# Altium PCB TMC5160_BOB_V1_2.PcbDoc
Units mm, origin at the board's own origin, x right, y up, seen from the top; angles counter-clockwise.
Board outline 38.1 x 27.94 mm, 4 copper layers (Top, GND, VM, Bottom), stack 0.704 mm thick; 48 components, 53 nets, 175 pads, 144 vias.
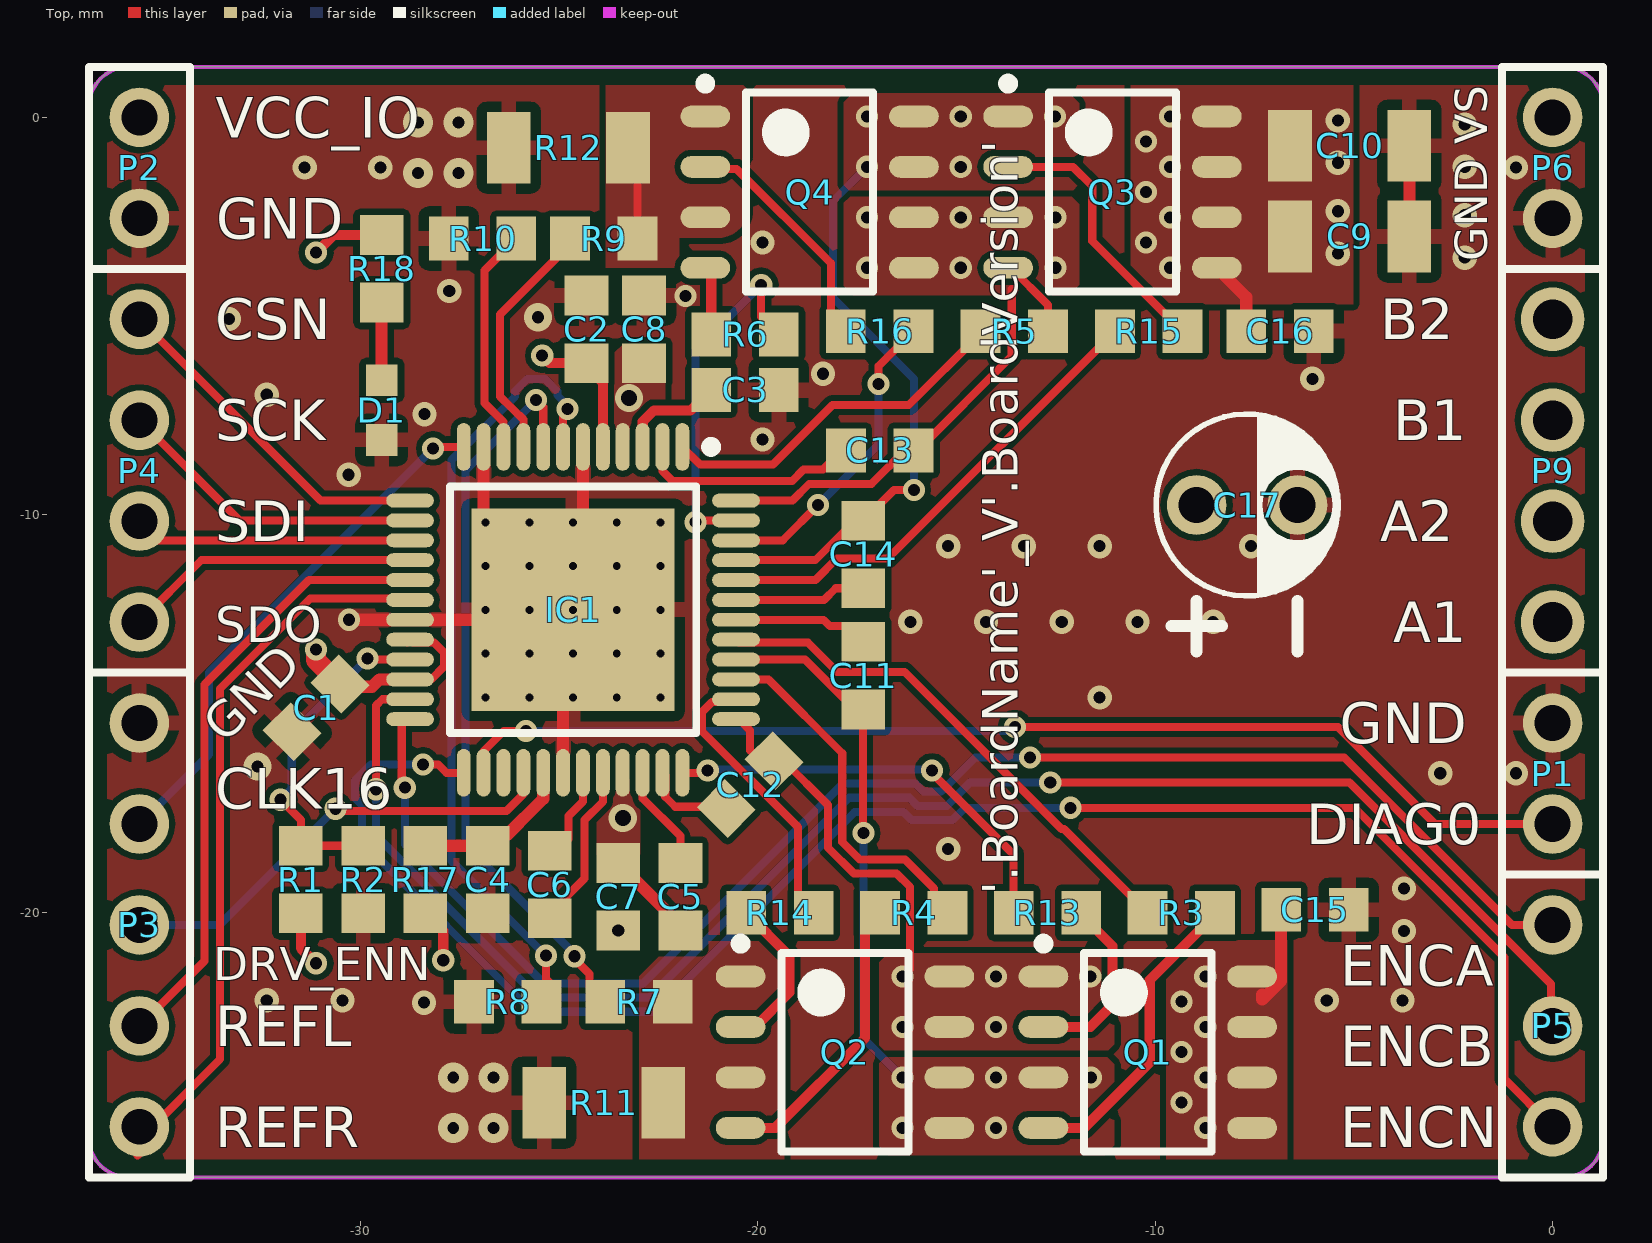
[diagram p0: Top view]
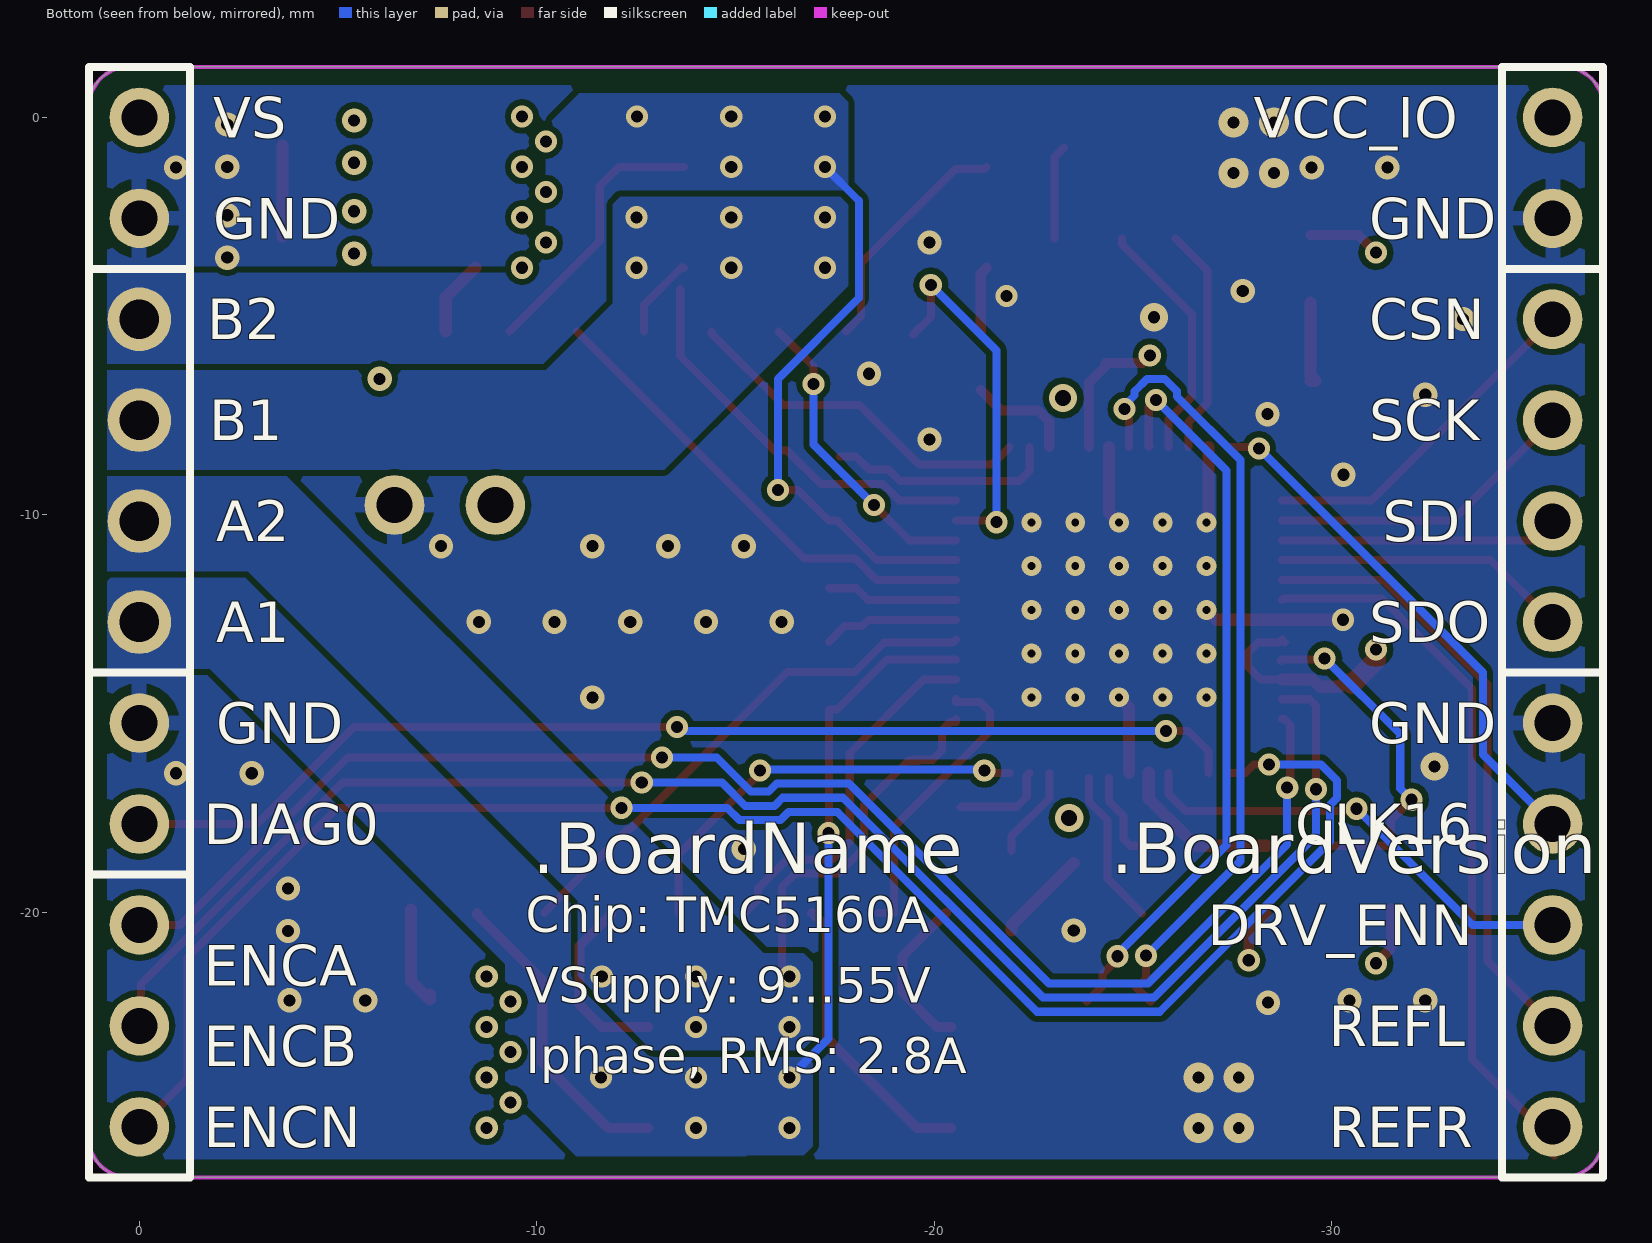
[diagram p1: Bottom view, seen from below]
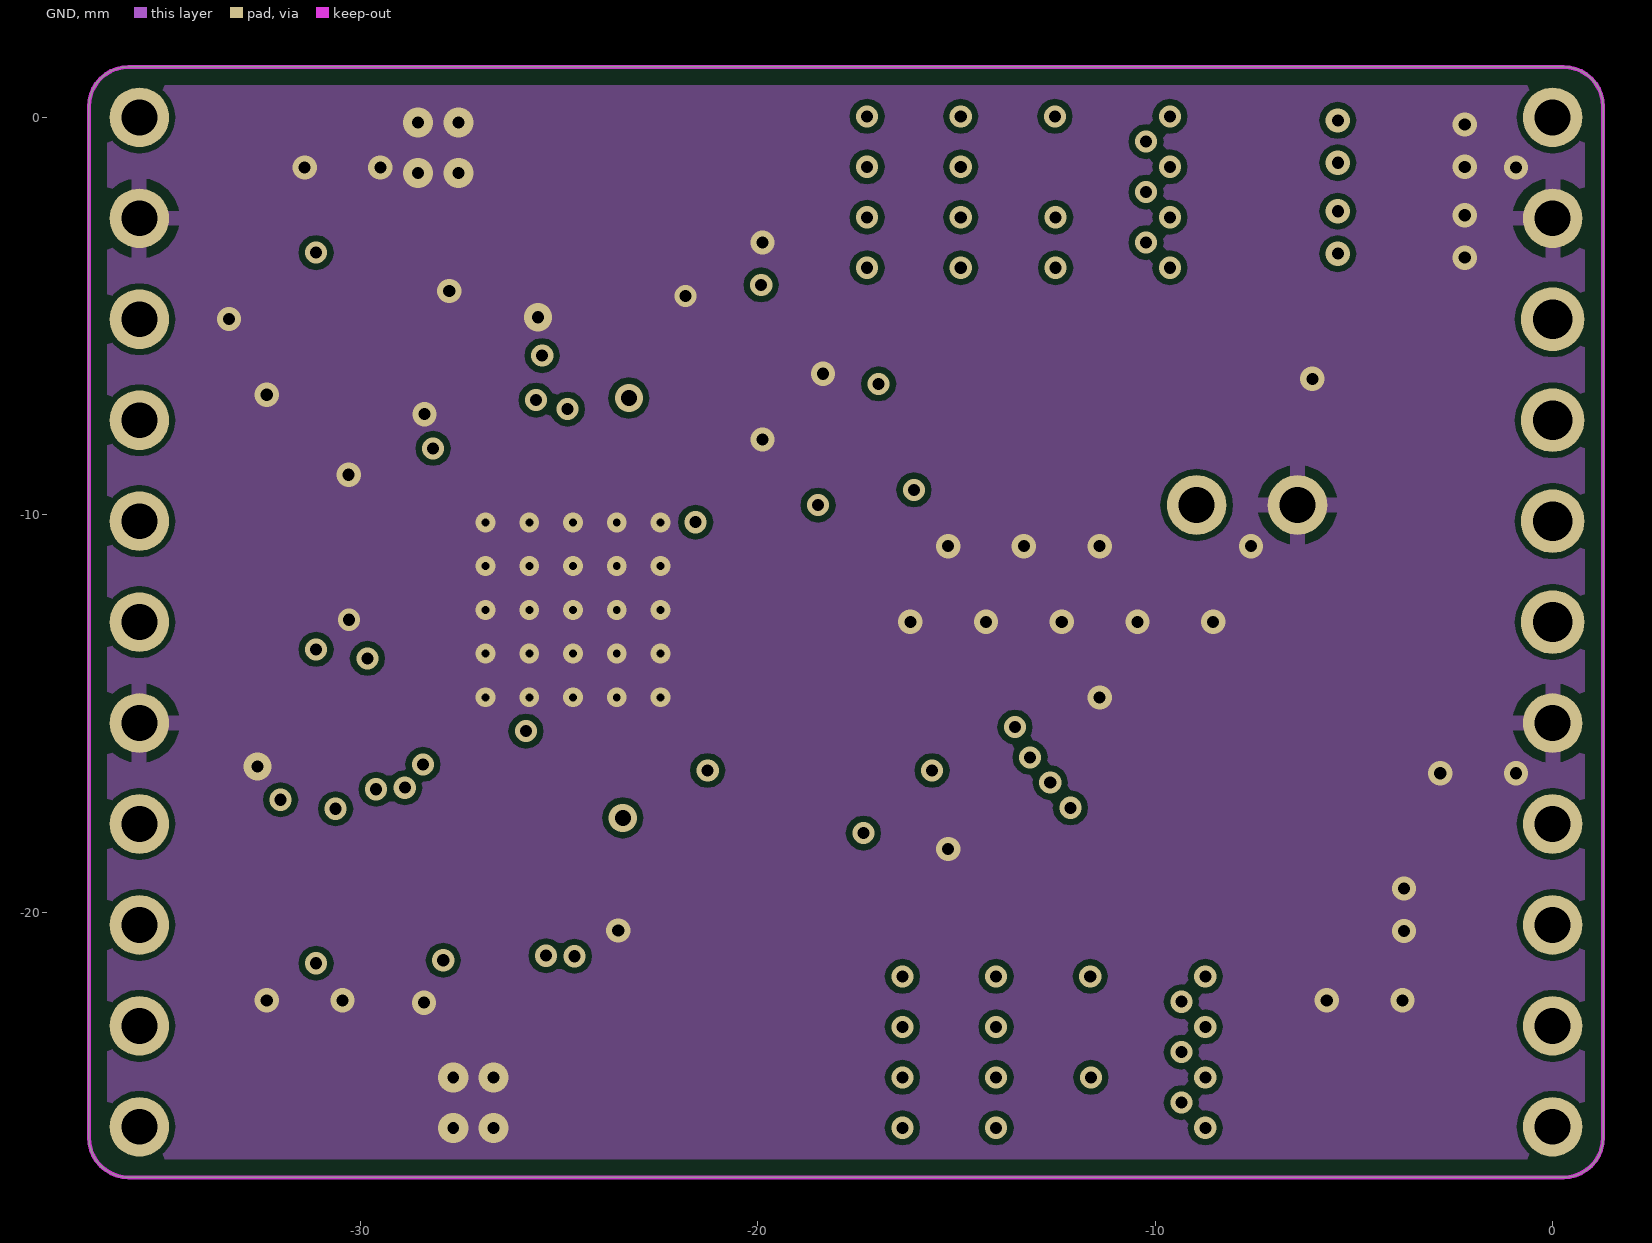
[diagram p2: GND]
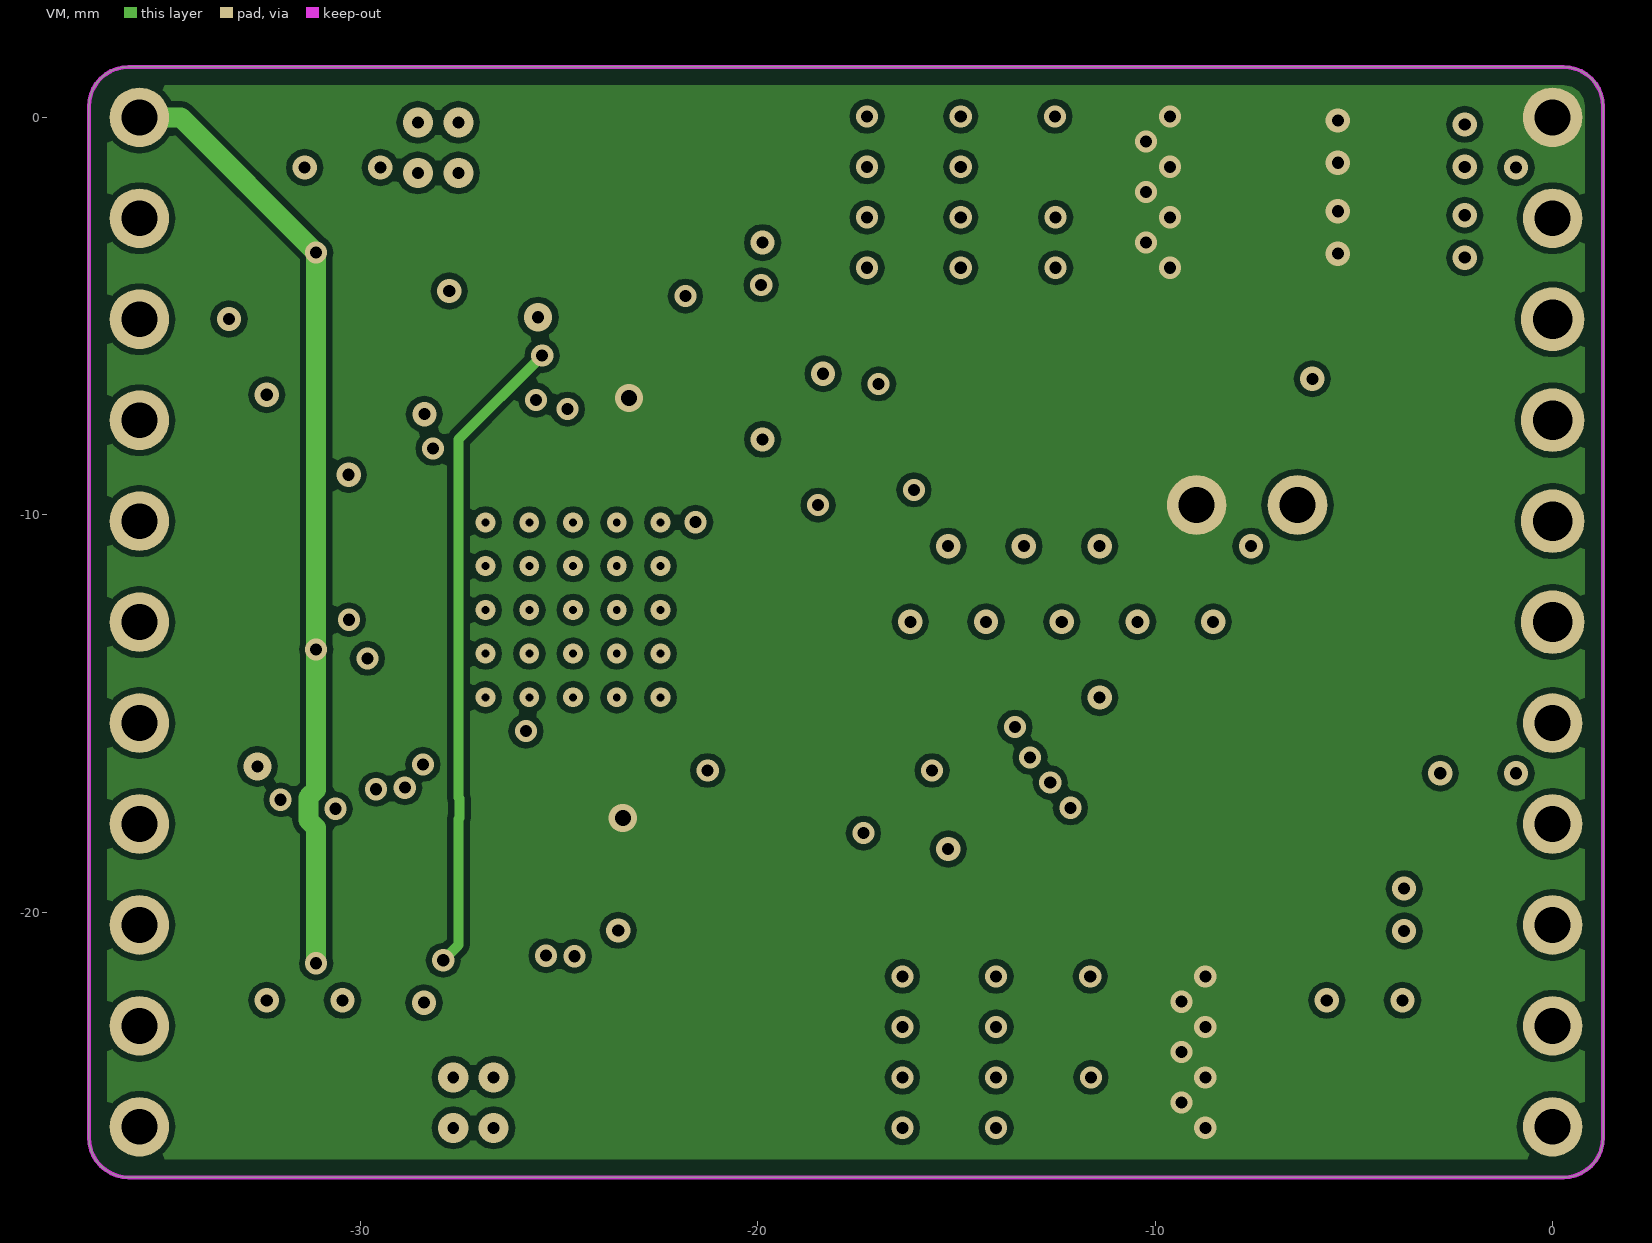
[diagram p3: VM]
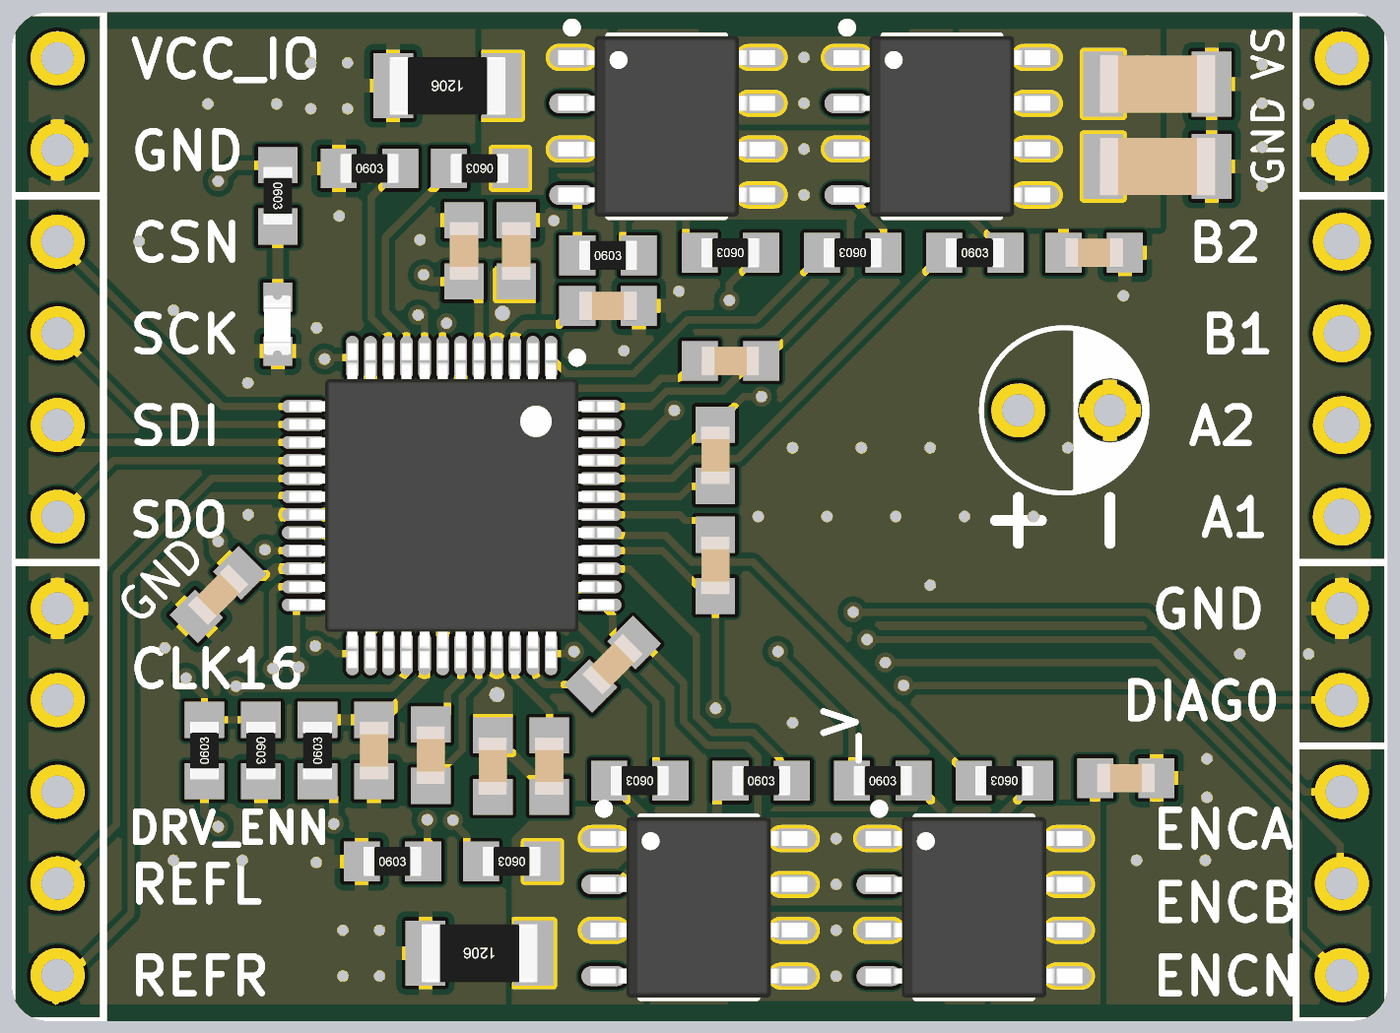
[diagram p4: 3D render of the assembled board from above, using the file's embedded part models]

## Layer stack, top to bottom
Top Solder: solder mask 0.0102, Solder Resist, Dk 3.5
Top: signal copper 0.035
Dielectric 1: core 0.2, FR-4, Dk 4.8
GND: signal copper 0.0175
Dielectric 2: prepreg 0.127, FR-4, Dk 4.2
VM: signal copper 0.0356
Dielectric4: core 0.254, FR-4, Dk 4.2
Bottom: signal copper 0.035
Bottom Solder: solder mask 0.0102, Solder Resist, Dk 3.5

## Board outline
-36.83,-25.67 ccw(c-35.83,-25.67) -35.83,-26.67 0.27,-26.67 ccw(c0.27,-25.67) 1.27,-25.67 1.27,0.27 ccw(c0.27,0.27) 0.27,1.27 -35.83,1.27 ccw(c-35.83,0.27) -36.83,0.27

## Design rules (kind name [scope] priority, off if disabled: settings)
Clearance BoardOutlineClearance [OnLayer('Keep-Out Layer')] p1: gap=0.4 ignorepadtopadclearanceinfootprint=FALSE except(0: Arc-Hole Track-Hole SMDPad-Hole THPad-Hole Via-Hole Fill-Hole Poly-Hole Region-Hole Text-Hole)
Clearance "Fiducial Clearance" [HasFootprint('FIDUCIAL_40MIL')] p2: gap=0.66 ignorepadtopadclearanceinfootprint=FALSE except(0: Arc-Hole Track-Hole SMDPad-Hole THPad-Hole Via-Hole Fill-Hole Poly-Hole Region-Hole Text-Hole)
Clearance "Mounting Hole Clearance" [(HoleDiameter >= 110) And  IsPad  And ((PadYSize_AllLayers - HoleDiameter)  <=  1)] p3: gap=0.762 ignorepadtopadclearanceinfootprint=FALSE except(0: Arc-Hole Track-Hole SMDPad-Hole THPad-Hole Via-Hole Fill-Hole Poly-Hole Region-Hole Text-Hole)
Clearance [All] p4: gap=0.152 ignorepadtopadclearanceinfootprint=TRUE except(0: Arc-Hole Track-Hole SMDPad-Hole THPad-Hole Via-Hole Fill-Hole Poly-Hole Region-Hole Text-Hole)
ComponentClearance Pinheader2PinheaderClearance [InComponentClass('Pinheader') vs InComponentClass('Pinheader')] p1: gap=0 collisioncheckmode=3 verticalgap=0 showdistances=FALSE
ComponentClearance [All] p2: gap=0 collisioncheckmode=3 verticalgap=2540 showdistances=FALSE
DiffPairsRouting [All] p1 off: maxlimit=0.254 minlimit=0.191 mostfreqgap=0.254 toplayer_prefgap=0.191 toplayer_minwidth=0.191 toplayer_maxwidth=0.191 toplayer_prefwidth=0.191 midlayer1_prefgap=0.191 midlayer1_minwidth=0.191 midlayer1_maxwidth=0.191 midlayer1_prefwidth=0.191 midlayer2_mingap=0.254 midlayer2_minwidth=0.381 midlayer2_maxwidth=0.381 midlayer2_prefwidth=0.381 bottomlayer_prefgap=0.191 bottomlayer_minwidth=0.191 bottomlayer_maxwidth=0.191 bottomlayer_prefwidth=0.191 maxuncoupledlength=12.7
HoleSize [All] p1: absolutevalues=TRUE maxlimit=2540 minlimit=0.2 maxpercent=80.000 minpercent=20.000
HoleToHoleClearance [All] p1: gap=0.203 allowstackedmicrovias=TRUE
MatchedLengths "SD_CARD MatchedLengths" [InNetClass('SD_CARD')] p1: tolerance=0.254 checknetsindiffpair=FALSE checkdiffpairvsdiffpair=TRUE checkxsignals=TRUE checkothers=TRUE
MinimumAnnularRing MinimumViaAnnualRing [All] p1: minimumring=0.125
MinimumSolderMaskSliver STM32_MinimumSolderMaskSliver [(InComponent('STM1') AND InComponent('STM2')) vs (InComponent('STM1') AND InComponent('STM2'))] p1: minsoldermaskwidth=0.025
MinimumSolderMaskSliver USB_HUB_MinimumSolderMaskSliver [InComponent('USB_HUB')] p2: minsoldermaskwidth=0.025
MinimumSolderMaskSliver [All] p3 off: minsoldermaskwidth=0.038
PasteMaskExpansion TestPadPasteMaskExpansion [HasFootprint('SMD_TP_2X2_ROUND')] p1: expansion=-2
PasteMaskExpansion [All] p2: expansion=0
PolygonConnect SA_SB_PolygonConnect [InNet('SA') OR InNet('SB')] p1: connectstyle=Direct reliefconductorwidth=1.778 reliefentries=4 polygonreliefangle="90 Angle" airgapwidth=0.254
PolygonConnect VM_PolygonConnect [InNet('+VM')] p2: connectstyle=Direct reliefconductorwidth=1.778 reliefentries=4 polygonreliefangle="90 Angle" airgapwidth=0.254
PolygonConnect ThermalVias [IsVia] p3: connectstyle=Direct reliefconductorwidth=0.254 reliefentries=4 polygonreliefangle="90 Angle" airgapwidth=0.254
PolygonConnect MotorOutputConStyle [InNetClass('MotorPowerOut')] p4: connectstyle=Direct reliefconductorwidth=0.254 reliefentries=4 polygonreliefangle="90 Angle" airgapwidth=0.254
PolygonConnect [All] p5: connectstyle=Relief reliefconductorwidth=0.381 reliefentries=4 polygonreliefangle="90 Angle" airgapwidth=0.254
RoutingVias [All] p1: holewidth=0.305 width=0.559 viastyle="Through Hole" minholewidth=0.305 minwidth=0.559 maxholewidth=0.305 maxwidth=1.27
ShortCircuit [All] p1 off: allowed=FALSE
SilkToBoardRegionClearance [All] p1 off:
SilkToSilkClearance [All] p1 off: silktosilkclearance=0.254
SilkToSolderMaskClearance [IsPad] p1 off: minsilkscreentomaskgap=0.254 clearancetoexposedcopper=TRUE
SolderMaskExpansion FiducialSolderMaskExpansion [HasFootprint('FIDUCIAL_40MIL')] p1: expansion=0.66 istentingtop=FALSE
SolderMaskExpansion [All] p2: expansion=0.102 istentingtop=FALSE
UnRoutedNet [All] p1 off:
Width VIN_Width [InNetClass('PWR_VIN')] p1: maxlimit=7.62 minlimit=5.08 preferedwidth=5.334
Width Other_Width [All] p2: maxlimit=2540 minlimit=0.203 preferedwidth=0.3 minimp=50.000000 maximp=50.000000 favimp=50.000000
19 further rules are at their usual default settings.

## Classes and differential pairs
net class MotorPowerOut: BMA1 BMA2 BMB1 BMB2

## Components (designator, comment, footprint, x,y, rotation, side; value= is the part's Value field where it differs from the comment)
C1 "100nF" C0603 -31.115,-14.859 r225 top
C2 "2u2" C0603 -24.308,-5.334 r90 top
C3 "2u2" C0603 -20.32,-6.858 r180 top
C4 "470nF" C0603 -26.797,-19.177 r270 top
C5 "100nF" C0603 -21.946,-19.609 r90 top
C6 "22nF" C0603 -25.231,-19.304 r270 top
C7 "100nF" C0603 -23.512,-19.609 r270 top
C8 "100nF" C0603 -22.86,-5.334 r90 top
C9 "10uF/50V/10%" C1206 -5.105,-2.997 r180 top
C10 "10uF/50V/10%" C1206 -5.105,-0.711 r180 top
C11 "220nF" C0603 -17.348,-14.046 r270 top
C12 "220nF" C0603 -20.194,-16.789 r45 top
C13 "220nF" C0603 -16.929,-8.382 r0 top
C14 "220nF" C0603 -17.348,-10.998 r90 top
C15 "470nF/50V" C0603 -5.981,-19.939 r0 top
C16 "470nF/50V" C0603 -6.858,-5.385 r0 top
C17 "Cap Pol1" EXT_POL_CAP -8.958,-9.754 r270 top value=TBD
D1 "LED, Blue, SMD, 20mA, 2.8V, 465 nm" LED_0603 -29.464,-7.366 r270 top
IC1 "TMC5160-TA" TMC5160_TSQFP50P900X900X120_HS-49L -24.649,-12.392 r270 top
P1 "AIN" 2_PIN_THT 0,-17.78 r0 top
P2 "VCC_IO" 2_PIN_THT -35.56,-2.54 r0 top
P3 "MISC" 5_PIN_THT -35.56,-25.4 r0 top
P4 "SPI" 4_PIN_THT -35.56,-5.08 r180 top
P5 "ENC" 3_PIN_THT 0,-25.4 r0 top
P6 "VM" 2_PIN_THT 0,-2.54 r0 top
P9 "MAB" 4_PIN_THT_1mm_hole 0,-5.08 r180 top
Q1 "AO4882" SOP127P600X170-8L -10.186,-23.52 r0 top
Q2 "AO4882" SOP127P600X170-8L -17.806,-23.52 r0 top
Q3 "AO4882" SOP127P600X170-8L -11.075,-1.88 r0 top
Q4 "AO4882" SOP127P600X170-8L -18.695,-1.88 r0 top
R1 "0R" R0603 -31.496,-19.177 r90 top
R2 "0R" R0603 -29.93,-19.177 r270 top
R3 "22R / 100mW / 1%" R0603 -9.346,-20.015 r180 top
R4 "22R / 100mW / 1%" R0603 -16.077,-20.015 r0 top
R5 "22R / 100mW / 1%" R0603 -13.547,-5.385 r180 top
R6 "22R / 100mW / 1%" R0603 -20.32,-5.461 r0 top
R7 "47R /  / 1%" R0603 -22.987,-22.25 r180 top
R8 "47R /  / 1%" R0603 -26.289,-22.25 r0 top
R9 "47R /  / 1%" R0603 -23.876,-3.048 r180 top
R10 "47R /  / 1%" R0603 -26.924,-3.048 r0 top
R11 "0R05 / 1W / 1%" R1206 -23.876,-24.79 r180 top
R12 "0R05 / 1W / 1%" R1206 -24.765,-0.762 r180 top
R13 "22R / 100mW / 1%" R0603 -12.712,-20.015 r0 top
R14 "22R / 100mW / 1%" R0603 -19.443,-20.015 r180 top
R15 "22R / 100mW / 1%" R0603 -10.16,-5.385 r0 top
R16 "22R / 100mW / 1%" R0603 -16.933,-5.385 r180 top
R17 "2R2/1%/" R0603 -28.363,-19.177 r90 top
R18 "1k" R0603 -29.464,-3.81 r270 top

## Footprints (in the part's own frame and the unit in brackets; to place one, negate y for a bottom-side part, rotate by r counter-clockwise, add the part's x,y. Pads: shape width x height; smd on the part's side, far side on the other; paste and mask are expansions set on the pad)
2_PIN_THT [mm]
  round 1.5 hole 0.9: 1(0,0) 2(0,2.54)
  silkscreen extent -1.27,-1.27 1.27,3.81
3_PIN_THT [mm]
  round 1.5 hole 0.9: 1(0,0) 2(0,2.54) 3(0,5.08)
  silkscreen extent -1.27,-1.27 1.27,6.35
4_PIN_THT [mm]
  round 1.5 hole 0.9: 1(0,0) 2(0,2.54) 3(0,5.08) 4(0,7.62)
  silkscreen extent -1.27,-1.27 1.27,8.89
4_PIN_THT_1mm_hole [mm]
  round 1.6 hole 1: 1(0,0) 2(0,2.54) 3(0,5.08) 4(0,7.62)
  silkscreen extent -1.27,-1.27 1.27,8.89
5_PIN_THT [mm]
  round 1.5 hole 0.9: 1(0,0) 2(0,2.54) 3(0,5.08) 4(0,7.62) 5(0,10.16)
  silkscreen extent -1.27,-1.27 1.27,11.43
C0603 [mm] "0603 ceramic capacitor"
  rect 1x1.1 smd: 1(-0.85,0) 2(0.85,0)
  body extent -0.8,-0.4 0.8,0.4, height 0.8
C1206 [mm] "1206 ceramic capacitor"
  rect 1.1x1.8 smd: 1(-1.5,0) 2(1.5,0)
  body extent -1.6,-0.8 1.6,0.8, height 0.76
EXT_POL_CAP [mm]
  round 1.5 hole 0.9: 1(0,0) 2(0,2.54)
  silkscreen extent -2.29,-1.02 3.68,3.56
LED_0603 [mm]
  rect 0.8x0.8 smd: 1(-0.75,0) 2(0.75,0)
  body extent -0.8,-0.38 0.85,0.35, height 0.68
R0603 [mm] "0603 resistor"
  rect 1x1.1 smd: 1(-0.85,0) 2(0.85,0)
  body extent -0.8,-0.4 0.8,0.4, height 0.45
R1206 [mm] "1206 resistor"
  rect 1.1x1.8 smd: 1(-1.5,0) 2(1.5,0)
  body extent -1.6,-0.8 1.6,0.8, height 0.6
SOP127P600X170-8L [mm] "SOP, 8-Leads, Body 4,90x3,90mm, Pitch 1,27mm, IPC High Density"
  oval 1.25x0.55 smd: 1(-2.625,1.905) 2(-2.625,0.635) 3(-2.625,-0.635) 4(-2.625,-1.905) 5(2.625,-1.905) 6(2.625,-0.635) 7(2.625,0.635) 8(2.625,1.905)
  silkscreen extent -2.75,-2.5 1.6,2.85, body extent -3,-2.5 3,2.5, height 1.7
TMC5160_TSQFP50P900X900X120_HS-49L [mm] "TSQFP, 48-Leads, Body 7,00x7,00mm, Pitch 0,50mm, Thermal Pad 5,10x5,10mm, IPC High Density"
  oval 1.2x0.35 smd mask+0.102: 1(-4.1,2.75) 2(-4.1,2.25) 3(-4.1,1.75) 4(-4.1,1.25) 5(-4.1,0.75) 6(-4.1,0.25) 7(-4.1,-0.25) 8(-4.1,-0.75) 9(-4.1,-1.25) 10(-4.1,-1.75) 11(-4.1,-2.25) 12(-4.1,-2.75) 25(4.1,-2.75) 26(4.1,-2.25) 27(4.1,-1.75) 28(4.1,-1.25) 29(4.1,-0.75) 30(4.1,-0.25) 31(4.1,0.25) 32(4.1,0.75) 33(4.1,1.25) 34(4.1,1.75) 35(4.1,2.25) 36(4.1,2.75)
  oval 0.35x1.2 smd mask+0.102: 13(-2.75,-4.1) 14(-2.25,-4.1) 15(-1.75,-4.1) 16(-1.25,-4.1) 17(-0.75,-4.1) 18(-0.25,-4.1) 19(0.25,-4.1) 20(0.75,-4.1) 21(1.25,-4.1) 22(1.75,-4.1) 23(2.25,-4.1) 24(2.75,-4.1) 37(2.75,4.1) 38(2.25,4.1) 39(1.75,4.1) 40(1.25,4.1) 41(0.75,4.1) 42(0.25,4.1) 43(-0.25,4.1) 44(-0.75,4.1) 45(-1.25,4.1) 46(-1.75,4.1) 47(-2.25,4.1) 48(-2.75,4.1)
  rect 5.1x5.1 smd: 49(0,0)
  silkscreen extent -4.22,-3.1 3.1,3.6, body extent -4.5,-4.5 4.5,4.5, height 1.2

## Part data
C1 C7 C8: library part Capacitor, "Ceramic capacitor", Manufacturer=Multicomp, MPN=MC0603F104M500CT, Voltage rating=50V, Capacitance=100nF, ComponentLinknDescription=Datasheet, Precision=20%, Type=MLCC
C2 C3: library part "2.2 µF, 25 V, ± 10%, X5R, GRM Series", "SMD Multilayer Ceramic Capacitor, 0603 [1608 Metric], 2.2 µF, 25 V, ± 10%, X5R, GRM Series", MPN=GRM188R61E225KA12D, Voltage rating=50V, Capacitance=2u2, ComponentLinknDescription=Datasheet, MF=MURATA, Precision=10%, Type=MLCC
C4: library part Capacitor, "Ceramic capacitor", MPN=MC0603X474K160CT, Voltage rating=16V, Capacitance=470nF, ComponentLinknDescription=Datasheet, MF=Multicomp, Precision=10%, Type=MLCC
C5: library part Capacitor, "Ceramic capacitor", MPN=MC0603F104M500CT, Voltage rating=50V, Capacitance=100nF, ComponentLinknDescription=Datasheet, MF=Multicomp, Precision=20%, Type=MLCC
C6: library part Capacitor, "Ceramic capacitor", MPN=MC0603B223K500CT, Voltage rating=50V, Capacitance=22nF, ComponentLinknDescription=Datasheet, MF=Multicomp, Precision=20%, Type=MLCC
C9 C10: library part "10 µF, 50 V, ± 20%, X5R, GRM Series", "SMD Multilayer Ceramic Capacitor, 1206 [3216 Metric], 10 µF, 50 V, ± 20%, X5R, GRM Series", Capacitance=10uF, MPN=GRM31CR61H106MA12L, VoltageRating=50V, ComponentLinknDescription=Datasheet, MF=MURATA, Precision=10%, Type=MLCC
C11 C12 C13 C14: library part "0.22 µF, 50 V, ± 10%, X7R", "SMD Multilayer Ceramic Capacitor, 0603 [1608 Metric], 0.22 µF, 50 V, ± 10%, X7R, GCM Series", MPN=GCM188R71H224KA64D, Voltage rating=50V, Capacitance=220nF, ComponentLinknDescription=Datasheet, MF=MURATA, Precision=10%, Type=MLCC
C15 C16: library part "0.47 µF, 50 V, ± 10%, X7R, C Series", "SMD Multilayer Ceramic Capacitor, 0603 [1608 Metric], 0.47 µF, 50 V, ± 10%, X7R, C Series", Capacitance=470nF, MPN=C1608X7R1H474K080AC, VoltageRating=50V, ComponentLinknDescription=Datasheet, MF=TDK, Precision=10%, Type=MLCC
C17: "Polarized Capacitor (Radial)", LatestRevisionDate=17-Jul-2002, LatestRevisionNote="Re-released for DXP Platform.", PackageDescription="Polarized Capacitor (Radial); 2 Leads", PackageReference=RB7.6-15, Published=8-Jun-2000, Publisher="Altium Limited"
D1: Colour=Blue, Current rating=20mA, MPN=LTST-C191TBKT-5A, MF=Lite-On
IC1: Manufacturer=TRINAMIC, Distributor#1=Digikey, Geometry.Height=1,2mm, MF=TRINAMIC, MPN=TMC5160-TA
P1 P2 P6: library part "Header 2", "Header, 2-Pin", ComponentClass=Pinheader, Fitted="Not fitted", LatestRevisionDate=17-Jul-2002, LatestRevisionNote="Re-released for DXP Platform.", Publisher="Altium Limited"
P3: library part "Header 5", "Header, 5-Pin", Fitted="Not fitted", LatestRevisionDate=17-Jul-2002, LatestRevisionNote="Re-released for DXP Platform.", Publisher="Altium Limited"
P4: library part "Header 4", "Header, 4-Pin", ComponentClass=Pinheader, Fitted="Not fitted", LatestRevisionDate=17-Jul-2002, LatestRevisionNote="Re-released for DXP Platform.", Publisher="Altium Limited"
P5: library part "Header 3", "Header, 3-Pin", Fitted="Not fitted", LatestRevisionDate=17-Jul-2002, LatestRevisionNote="Re-released for DXP Platform.", Publisher="Altium Limited"
P9: library part "Wire-To-Board Connector, 2.5 mm, 4 Contacts, Header, EH Series, Through Hole, 1 Rows", "Wire-To-Board Connector, 2.5 mm, 4 Contacts, Header, EH Series, Through Hole, 1 Rows", MPN=B4B-EH-A, Fitted="Not fitted", MF="JST (JAPAN SOLDERLESS TERMINALS)"
Q1 Q2 Q3 Q4: library part "AO4882 MOSFET 2N-CH 40V 8A 8SOIC", "Mosfet Array 2 N-Channel (Dual) 40V 8A 2W Surface Mount 8-SOIC", MF="Alpha & Omega Semiconductor Inc.", MPN=AO4882
R1 R2: library part "0 ohm, 0603 [1608 Metric], 100 mW, MCWR Series", "SMD Chip Resistor, Thick Film, 0 ohm, 0603 [1608 Metric], 100 mW, MCWR Series", MPN="MCWR06X000 PTL", PowerRating=100mW, Temp coefficient=*ppm, MF=MULTICOMP, Resistance=0R
R3 R4 R5 R6 R13 R14 R15 R16: library part "22 ohm, 50 V, 0603 [1608 Metric], 100 mW, ± 1%, MCWR Series", "SMD Chip Resistor, Thick Film, 22 ohm, 50 V, 0603 [1608 Metric], 100 mW, ± 1%, MCWR Series", MPN=MCWR06X22R0FTLV, PowerRating=100mW, Resistance=22R, Temp coefficient=*ppm, MF=MULTICOMP, Precision=1%
R7 R8 R9 R10: library part "47 ohm, 75 V, 0603 [1608 Metric], 100 mW, ± 1%, MCSR 06 Series", "SMD Chip Resistor, Ceramic, 47 ohm, 75 V, 0603 [1608 Metric], 100 mW, ± 1%, MCSR 06 Series", MPN=MCSR06X47R0FTL, Resistance=47R, Temp coefficient=*ppm, MF=MULTICOMP, Precision=1%
R11 R12: library part "0.05 ohm, 1 W, 1206 [3216 Metric], ± 1%, WSLP Series", "SMD Current Sense Resistor, 0.05 ohm, 1 W, 1206 [3216 Metric], ± 1%, WSLP Series", MPN=WSLP1206R0500FEA, PowerRating=1W, Resistance=0R05, Temp coefficient=*ppm, MF=VISHAY, Precision=1%
R17: library part Resistor, "Resistor", MPN=MC0063W060312R2, Power rating=*mW, Resistance=2R2, Temp coefficient=*ppm, Voltage rating=*V, ComponentLinknDescription=Datasheet, MF=Multicomp, Precision=1%
R18: library part "1 kohm, 50 V, 0603 [1608 Metric], 63 mW, ± 1%, MC Series", "1 kohm, 50 V, 0603 [1608 Metric], 63 mW, ± 1%, MC Series", MPN=MC0063W060311K, PowerRating=63mW, Temp coefficient=*ppm, VoltageRating=50V, MF=MULTICOMP, Precision=1%, Resistance=1k

## Via types
v1: diameter 0.559, hole 0.305, Top to Bottom, tented both sides, 66 vias
v2: diameter 0.5, hole 0.2, Top to Bottom, tented bottom, 25 vias
v3: diameter 0.612, hole 0.305, Top to Bottom, tented both sides, 22 vias
v4: diameter 0.61, hole 0.305, Top to Bottom, tented both sides, 19 vias
v5: diameter 0.757, hole 0.3, Top to Bottom, tented both sides, 8 vias
v6: diameter 0.711, hole 0.406, Top to Bottom, tented both sides, 2 vias
v7: diameter 0.711, hole 0.305, Top to Bottom, tented both sides, 2 vias

## Nets (pads, with @x,y where several pads share a name; then routed paths per layer and width w, separated by ;. In a path a pad name is that pad's centre, name@x,y a point inside that pad or via, vN(x,y) a via of type N, cw(c..) or ccw(c..) an arc to the next point about the centre after c; other vN are vias at no path point)
5V_OUT: C2.1 IC1.5 R17.1 | length 21.1
  Top w0.254: R17.1 -27.915,-20.476 v1(-27.915,-21.209) ; v1(-25.425,-5.994) -25.236,-6.184 C2.1@-24.384,-6.184 ; C2.1 C2.1@-24.384,-6.184 ; IC1.5 -23.899,-6.669 C2.1@-24.384,-6.184
  VM w0.254: v1(-27.915,-21.209) -27.534,-20.828 -27.534,-17.656 -27.508,-17.63 -27.508,-17.142 -27.534,-17.117 -27.534,-8.103 v1(-25.425,-5.994)
+VM: C5.1 C7.1 C8.1 C9.2 C10.2 C15.1 C16.1 C17.1 IC1.4 IC1.33 P6.2 Q1.5 Q1.6 Q1.7 Q1.8 Q3.5 Q3.6 Q3.7 Q3.8 | length 6.8
  Top w0.305: C7.1 -21.946,-20.325 C5.1 ; Q3.5 -7.708,-4.527 C16.1 ; -7.307,-22.073 -7.307,-22.2 -6.831,-21.723 C15.1
  other v1: -8.739,-25.425 -9.339,-24.79 -8.739,-24.155 -9.339,-23.52 -8.739,-22.885 -9.339,-22.25 -8.739,-21.615 -9.628,-3.785 -10.228,-3.15 -9.628,-2.515 -10.228,-1.88 -9.628,-1.245 -10.228,-0.61 -9.628,0.025
  other v4: -5.405,-3.429 -5.405,-2.362 -5.405,-1.143 -5.405,-0.076
  other v6: -23.395,-17.628 -23.242,-7.061
BMA1: C11.2 IC1.40 P9.4 Q1.3 Q2.5 Q2.6 | length 13.4
  Top w0.203: IC1.40 -18.815,-13.642 -17.56,-14.896 C11.2 -17.348,-18.001 v1(-17.34,-18.009)
  Bottom w0.203: v1(-17.34,-18.009) -17.34,-23.174 v1(-16.359,-24.155)
  other v1: -16.359,-25.425 -14.003,-25.425 -14.003,-24.155 -11.619,-24.155
BMA2: C12.2 IC1.37 P9.3 Q1.1 Q2.7 Q2.8 | length 9.5
  Top w0.203: IC1.37 -20.549,-15.215 -20.401,-15.215 -20.193,-15.423 -20.193,-15.926 -19.956,-16.163 C12.2@-19.465,-16.163 ; C12.2 -19.345,-16.188 -18.229,-17.304 -18.229,-18.377 -17.581,-19.025 -16.509,-19.025 -16.173,-19.36 -16.173,-21.43 v1(-16.359,-21.615)
  other v1: -16.359,-22.885 -14.003,-22.885 -14.003,-21.615 -11.633,-21.615
BMB1: C13.2 IC1.48 P9.2 Q3.3 Q4.5 Q4.6 | length 10.1
  Top w0.203: IC1.48 -19.126,-9.642 -18.704,-9.22 -17.136,-9.22 -16.298,-8.382 C13.2 -15.985,-8.382 -13.609,-6.007 -13.609,-4.314
  other v1: -17.248,-3.785 -14.892,-3.785 -12.508,-3.785 -17.248,-2.515 -14.892,-2.515 -12.508,-2.515
BMB2: C14.2 IC1.45 P9.1 Q3.1 Q4.7 Q4.8 | length 14.5
  Top w0.203: IC1.45 -18.554,-11.142 -17.56,-10.148 C14.2 -16.573,-9.373 v1(-16.07,-9.373)
  Bottom w0.203: v1(-17.248,-1.245) -18.102,-2.099 -18.102,-4.547 -16.07,-6.579 v1(-16.07,-9.373)
  other v1: -14.892,-1.245 -17.248,0.025 -14.892,0.025 -12.522,0.025
CA1: C11.1 IC1.42 | length 3.4
  Top w0.203: IC1.42 -18.348,-12.642 -18.188,-12.802 -17.743,-12.802 C11.1
CA2: C12.1 IC1.35 | length 2.4
  Top w0.203: IC1.35 -22.328,-16.563 -22.328,-17.094 -22.076,-17.346 -20.686,-17.346 C12.1@-20.667,-17.365
CB1: C13.1 IC1.2 | length 5.7
  Top w0.203: IC1.2 -22.399,-8.895 -22.148,-9.146 -19.133,-9.146 -18.851,-8.865 -18.356,-8.865 -18.026,-8.534 C13.1@-17.629,-8.534
CB2: C14.1 IC1.43 | length 3.3
  Top w0.203: IC1.43 -18.331,-12.142 -18.038,-11.848 C14.1
CLK16: IC1.12 P3.4 | length 13.3
  Top w0.203: v1(-28.169,-8.331) -28.129,-8.292 IC1.12
  Bottom w0.203: P3.4 -33.807,-16.027 -33.807,-13.97 v1(-28.169,-8.331)
CSN: IC1.13 P4.1 | length 8.7
  Top w0.203: P4.1 -30.998,-9.642 IC1.13
DIAG0: IC1.26 P1.1 | length 28.7
  Top w0.203: IC1.26 -26.899,-15.95 -26.392,-15.443 v1(-25.833,-15.443) ; v1(-13.53,-15.342) -5.402,-15.342 -2.964,-17.78 P1.1
  Bottom w0.203: v1(-25.833,-15.443) -13.632,-15.443 v1(-13.53,-15.342)
DRV_ENN: IC1.28 P3.3 | length 11.6
  Top w0.203: v1(-30.622,-17.395) -30.568,-17.45 -26.325,-17.45 -25.899,-17.023 IC1.28
  Bottom w0.203: P3.3 -33.547,-20.32 v1(-30.622,-17.395)
ENCA: IC1.24 P5.3 | length 37.9
  Top w0.203: v1(-28.881,-16.866) -28.957,-16.789 -28.957,-15.286 -28.813,-15.142 IC1.24 ; v1(-13.149,-16.104) -5.243,-16.104 -1.026,-20.32 P5.3
  Bottom w0.203: v1(-28.881,-16.866) -28.881,-18.292 -25.38,-21.793 -22.885,-21.793 -17.856,-16.764 -16.037,-16.764 -15.834,-16.967 -15.392,-16.967 -14.528,-16.104 v1(-13.149,-16.104)
ENCB: IC1.23 P5.2 | length 41
  Top w0.203: v1(-29.603,-16.906) -29.603,-14.797 -29.447,-14.642 IC1.23 ; v1(-12.641,-16.739) -5.11,-16.739 -0.044,-21.805 -0.044,-22.816 P5.2
  Bottom w0.203: v1(-29.603,-16.906) -29.603,-18.073 -25.527,-22.149 -22.738,-22.149 -17.708,-17.12 -16.184,-17.12 -15.981,-17.323 -15.245,-17.323 -14.661,-16.739 v1(-12.641,-16.739)
ENCN: IC1.25 P5.1 | length 43.7
  Top w0.203: v1(-28.424,-16.281) -28.04,-16.281 -27.83,-16.492 IC1.25 ; v1(-12.133,-17.374) -4.978,-17.374 -1.211,-21.141 -1.211,-24.189 P5.1
  Bottom w0.203: v1(-28.424,-16.281) -29.732,-16.281 -30.136,-16.685 -30.136,-17.127 -29.958,-17.305 -29.958,-18.221 -25.674,-22.504 -22.59,-22.504 -17.561,-17.475 -16.332,-17.475 -16.128,-17.678 -15.097,-17.678 -14.793,-17.374 v1(-12.133,-17.374)
GND: C1.2 C2.2 C3.1 C4.2 C7.2 C8.2 C9.1 C10.1 C15.2 C16.2 C17.2 D1.2 IC1.6 IC1.11 IC1.19 IC1.30 IC1.49 P1.2 P2.1 P3.5 P6.1 R2.2 R8.1 R10.1 R11.2 R12.2 | length 11.8
  Top w0.305: v1(-30.286,-12.642) IC1.19 -27.099,-12.642 v2(-26.849,-12.392) ; IC1.11 -26.899,-10.142 v2(-26.849,-10.192) ; IC1.30 -24.899,-14.842 v2(-24.649,-14.592) ; v2(-24.649,-10.192) -24.399,-9.942 IC1.6 ; C9.1 C10.1
  other v1: -21.82,-4.496
  other v2: -26.849,-14.592 -25.749,-14.592 -23.549,-14.592 -22.449,-14.592 -26.849,-13.492 -25.749,-13.492 -24.649,-13.492 -23.549,-13.492 -22.449,-13.492 -25.749,-12.392 -24.649,-12.392 -23.549,-12.392 -22.449,-12.392 -26.849,-11.292 -25.749,-11.292 -24.649,-11.292 -23.549,-11.292 -22.449,-11.292 -25.749,-10.192 -23.549,-10.192 -22.449,-10.192
  other v3: -32.354,-22.218 -30.449,-22.218 -5.684,-22.218 -3.779,-22.218 -15.209,-18.408 -2.826,-16.503 -0.921,-16.503 -11.399,-14.598 -16.161,-12.693 -14.256,-12.693 -12.351,-12.693 -10.446,-12.693 -8.541,-12.693 -15.209,-10.788 -13.304,-10.788 -11.399,-10.788 -7.589,-10.788 -32.354,-6.978 -33.306,-5.073 -31.401,-1.263 -29.496,-1.263 -0.921,-1.263
  other v4: -28.399,-22.276 -23.512,-20.459 -3.737,-20.472 -3.737,-19.406 -30.294,-8.992 -19.88,-8.103 -28.389,-7.468 -6.047,-6.579 -18.356,-6.452 -27.764,-4.369 -2.211,-3.531 -19.88,-3.15 -2.211,-2.464 -2.211,-1.245 -2.211,-0.178
  other v5: -27.662,-25.425 -26.646,-25.425 -27.662,-24.155 -26.646,-24.155 -28.551,-1.397 -27.535,-1.397 -28.551,-0.127 -27.535,-0.127
  other v7: -32.588,-16.332 -25.527,-5.029
HA1: IC1.41 R3.2 | length 13.2
  Top w0.203: IC1.41 -20.478,-13.213 -18.741,-13.213 -18.003,-13.95 -16.311,-13.95 -12.354,-17.907 -12.295,-17.907 -10.196,-20.006 R3.2
HA2: IC1.36 R13.1 | length 10.8
  Top w0.203: IC1.36 -21.319,-16.492 v1(-21.261,-16.434) ; v1(-15.613,-16.434) -15.613,-16.494 -13.562,-18.545 R13.1
  Bottom w0.203: v1(-21.261,-16.434) -21.236,-16.408 -15.638,-16.408 v1(-15.613,-16.434)
HB1: IC1.1 R5.2 | length 9.1
  Top w0.203: IC1.1 -21.453,-8.738 -19.616,-8.738 -18.117,-7.239 -16.201,-7.239 -14.397,-5.435 R5.2
HB2: IC1.44 R15.1 | length 12.1
  Top w0.203: IC1.44 -18.551,-11.642 -18.003,-11.094 -16.719,-11.094 R15.1
LA1: IC1.39 R4.2 | length 9.2
  Top w0.203: IC1.39 -19.732,-14.142 -17.874,-16.001 -17.874,-18.23 -17.434,-18.669 -16.299,-18.669 -15.562,-19.406 -15.562,-19.68 R4.2
LA2: IC1.38 R14.1 | length 7.5
  Top w0.203: IC1.38@-20.544,-14.647 IC1.38 -20.549,-14.713 -21.151,-14.713 -21.403,-14.964 -21.403,-15.445 -18.991,-17.857 -18.991,-20.015 R14.1
LB1: IC1.47 R6.2 | length 9
  Top w0.203: v1(-21.566,-10.185) -21.522,-10.142 IC1.47 ; v1@-19.915,-4.293 -19.915,-5.016 R6.2
  Bottom w0.203: v1(-21.566,-10.185) -21.566,-5.867 v1(-19.915,-4.216)
LB2: IC1.46 R16.1 | length 7.8
  Top w0.203: IC1.46 -19.371,-10.642 v1(-18.483,-9.754) ; v1(-16.959,-6.706) -16.959,-6.261 R16.1
  Bottom w0.203: v1(-18.483,-9.754) -16.959,-8.23 v1(-16.959,-6.706)
NetC3_2: C3.2 IC1.3 | length 2.7
  Top w0.254: IC1.3 -22.894,-8.292 -22.894,-7.654 -22.612,-7.372 -21.694,-7.372 -21.689,-7.377 C3.2
NetC5_2: C5.2 IC1.34 | length 2.4
  Top w0.203: IC1.34 -22.899,-17.133 -21.946,-18.086 C5.2@-21.946,-18.454
NetC6_1: C6.1 IC1.31 | length 2.2
  Top w0.203: C6.1@-25.231,-18.327 -24.931,-18.327 -24.765,-18.161 -24.765,-17.582 -24.399,-17.215 IC1.31@-24.399,-16.619
NetC6_2: C6.2 IC1.32 | length 4
  Top w0.203: C6.2@-25.231,-20.027 -24.357,-19.153 -24.357,-17.676 -23.899,-17.218 IC1.32@-23.899,-16.619
NetD1_1: D1.1 R18.2 | length 2.2
  Top w0.305: D1.1 -29.477,-6.629 -29.591,-6.629 -29.464,-6.502 R18.2
NetQ1_2: Q1.2 R13.2 | length 4.6
  Top w0.254: Q1.2 -11.635,-22.885 -11.075,-22.325 -11.075,-20.852 -11.862,-20.065 R13.2
NetQ1_4: Q1.4 R3.1 | length 7.8
  Top w0.254: Q1.4 -11.787,-25.425 -10.136,-23.774 -10.136,-21.705 -8.496,-20.065 R3.1
NetQ2_2: Q2.2 R14.2 | length 4
  Top w0.254: Q2.2 -20.066,-22.885 -19.202,-22.022 -19.202,-21.106 R14.2
NetQ2_4: Q2.4 R4.1 | length 7.4
  Top w0.254: Q2.4 -19.558,-25.425 -17.299,-23.166 -17.299,-20.387 R4.1
NetQ3_2: Q3.2 R15.2 | length 6.9
  Top w0.203: Q3.2 -12.066,-1.245 -11.584,-1.727 -11.584,-3.111 R15.2
NetQ3_4: Q3.4 R5.1 | length 2.1
  Top w0.203: Q3.4 -13.635,-3.785 -12.697,-4.723 R5.1
NetQ4_2: Q4.2 R16.2 | length 6
  Top w0.203: Q4.2 -21.269,-1.295 -20.535,-1.295 -18.162,-3.668 -18.162,-5.006 R16.2
NetQ4_4: Q4.4 R6.1 | length 1.7
  Top w0.254: Q4.4 -21.17,-3.935 R6.1@-21.17,-5.385
REFL: IC1.17 P3.2 | length 15.5
  Top w0.203: P3.2 -33.924,-21.224 -33.924,-14.27 -31.296,-11.642 IC1.17
REFR: IC1.18 P3.1 | length 19.1
  Top w0.203: P3.1 P3.1@-35.56,-25.73 ; IC1.18 -28.782,-12.108 -31.26,-12.108 -33.528,-14.376 -33.528,-23.698 P3.1@-35.56,-25.73 ; P3.1@-35.56,-25.73 -35.56,-26.067 -35.611,-26.118 -35.611,-25.781 P3.1@-35.56,-25.73
SA: Q2.1 Q2.3 R7.1 R11.1
SB: Q4.1 Q4.3 R9.1 R12.1 | length 2.4
  Top w0.203: R12.1 -23.026,-1.001 R9.1
SCK: IC1.14 P4.2 | length 7.9
  Top w0.203: P4.2 -33.038,-10.142 IC1.14
SD_MODE: IC1.21 R1.2 R2.1 | length 8.5
  Top w0.203: v1(-32.005,-17.17) -31.496,-17.68 R1.2 R2.1 ; v1(-29.821,-13.614) -29.794,-13.642 IC1.21 IC1.21@-28.718,-13.672
  Bottom w0.203: v1(-32.005,-17.17) -31.726,-16.891 -31.726,-15.519 v1(-29.821,-13.614)
SDI: IC1.15 P4.3 | length 7
  Top w0.203: P4.3 -35.078,-10.642 IC1.15
SDO: IC1.16 P4.4 | length 7.5
  Top w0.203: P4.4 -34.002,-11.142 IC1.16
SRAH: IC1.8 R7.2 | length 18.6
  Top w0.203: v1(-25.578,-7.112) -25.399,-7.291 IC1.8 IC1.8@-25.425,-8.265 ; v1(-24.614,-21.107) -24.614,-21.176 -24.235,-21.555 -24.235,-21.852 R7.2
  Bottom w0.203: v1(-25.578,-7.112) -27.353,-8.887 -27.353,-18.312 -24.614,-21.05 v1(-24.614,-21.107)
SRAL: IC1.7 R8.2 | length 20.1
  Top w0.203: R8.2 -25.097,-21.908 -25.325,-21.679 v1(-25.325,-21.094) ; IC1.7 -24.899,-7.449 v1(-24.79,-7.341)
  Bottom w0.203: v1(-25.325,-21.094) -27.708,-18.711 -27.708,-8.625 -26.111,-7.028 -26.111,-6.891 -25.799,-6.579 -25.357,-6.579 -25.044,-6.891 -25.044,-6.99 -24.79,-7.244 v1(-24.79,-7.341)
SRBH: IC1.9 R9.2 | length 6.2
  Top w0.203: IC1.9 -25.899,-7.603 -26.152,-7.35 -26.482,-7.02 -26.482,-4.959 -24.726,-3.203 R9.2
SRBL: IC1.10 R10.2 | length 5.8
  Top w0.203: IC1.10 -26.399,-7.663 -26.878,-7.184 -26.878,-3.852 R10.2
VCC: C4.1 IC1.29 R17.2 | length 4.1
  Top w0.305: R17.2 C4.1 -26.582,-18.327 -26.085,-17.83 -26.085,-17.828 -25.907,-17.649 -25.904,-17.649 -25.399,-17.144 IC1.29
VCC_IO: C1.1 IC1.20 IC1.22 P2.2 R1.1 R18.1 | length 32.8
  Top w0.203: IC1.20@-28.82,-13.213 IC1.20 -28.678,-13.213 -28.146,-13.213 -27.895,-13.464 -27.895,-13.819 -28.217,-14.142 IC1.22
  Top w0.254: R1.1@-31.496,-19.9 -31.496,-20.904 v1(-31.115,-21.285) ; v1(-31.115,-3.404) -30.671,-2.96 R18.1 ; C1.1 C1.1@-30.398,-14.142
  Top w0.305: C1.1@-30.398,-14.142 -30.374,-14.142 -30.19,-14.326 -29.706,-14.326 -29.522,-14.142 IC1.22
  Top w0.508: v1(-31.115,-13.386) -31.115,-13.657 C1.1
  VM w0.508: P2.2 -34.519,0 v1(-31.115,-3.404) v1(-31.115,-13.386) -31.115,-16.918 -31.308,-17.111 -31.308,-17.679 -31.115,-17.872 v1(-31.115,-21.285)
pads on no net: IC1.27

## Polygon pours and split planes (outlines as drawn)
BMB1 on Top "BMB1_L01_P035" (solid, pour order 92): -17.659,-1.981 -17.832,-2.154 -17.832,-4.242 -17.604,-4.47 -12.168,-4.47 -11.914,-4.216 -11.914,-2.184 -12.117,-1.981
SB on Top "SB_L01_P043" (solid, pour order 93): -23.827,0.813 -23.827,-3.785 -21.972,-3.785 -21.972,-3.023 -20.956,-3.023 ccw(c-20.956,-2.342) -20.276,-2.342 -20.276,0.813
SA on Top "SA_L01_P042" (solid, pour order 96): -22.988,-26.67 -22.988,-21.617 -22.102,-20.73 -19.981,-20.73 -19.331,-21.38 -19.331,-26.67
BMB2 on Top "BMB1_L01_P035" (solid, pour order 89): -17.608,0.61 -17.832,0.386 -17.832,-1.702 -17.705,-1.829 -12.066,-1.829 -11.914,-1.676 -11.914,0.356 -12.168,0.61
BMA2 on Top "BMB1_L01_P035" (solid, pour order 90): -16.719,-21.031 -16.943,-21.255 -16.943,-23.343 -16.816,-23.47 -11.177,-23.47 -11.025,-23.317 -11.025,-21.285 -11.279,-21.031
BMA1 on Top "BMB1_L01_P035" (solid, pour order 91): -16.795,-23.647 -16.943,-23.795 -16.943,-25.883 -16.715,-26.111 -11.279,-26.111 -11.025,-25.857 -11.025,-23.825 -11.203,-23.647
+VM on Top "+VM_L01_P038" (solid, pour order 94): -10.609,1.27 -10.609,-3.719 -9.63,-4.699 -5.021,-4.699 -5.021,1.27
+VM on Top "+VM_L01_P038" (solid, pour order 95): -9.72,-26.67 -9.72,-21.681 -8.741,-20.701 -6.682,-20.701 -6.682,-26.67
+VM on Top "+VM_L01_P039" (solid, pour order 87): -23.399,-16.492 -24.054,-17.147 -24.054,-18.567 -22.987,-18.567 -22.962,-18.542 -22.962,-16.929
+VM on Top "+VM_L01_P037" (solid, pour order 88): -23.399,-8.292 -23.534,-8.292 -23.749,-8.077 -23.749,-6.071 -23.393,-5.715 -22.454,-5.715 -22.327,-5.842 -22.327,-7.087 -22.612,-7.372 -22.612,-7.505
GND on Top "GND_L01_P035" (solid, pour order 97): -36.83,-25.67 -36.83,0.27 cw(c-35.83,0.27) -35.83,1.27 0.27,1.27 cw(c0.27,0.27) 1.27,0.27 1.27,-25.67 cw(c0.27,-25.67) 0.27,-26.67 -35.83,-26.67 cw(c-35.83,-25.67)
BMA1 on Bottom "BMB1_L01_P035" (solid, pour order 102): -16.795,-23.647 -16.943,-23.795 -16.943,-25.883 -16.715,-26.111 -11.279,-26.111 -11.025,-25.857 -11.025,-23.825 -11.203,-23.647
BMA2 on Bottom "BMB1_L01_P035" (solid, pour order 101): -16.719,-21.031 -16.943,-21.255 -16.943,-23.343 -16.816,-23.47 -12.895,-23.47 -11.025,-21.599 -11.025,-21.285 -11.279,-21.031
BMB2 on Bottom "BMB1_L01_P035" (solid, pour order 100): -17.608,0.61 -17.832,0.386 -17.832,-1.702 -17.705,-1.829 -12.066,-1.829 -11.914,-1.676 -11.914,0.356 -12.168,0.61
BMB1 on Bottom "BMB1_L01_P035" (solid, pour order 104): -17.659,-1.981 -17.832,-2.154 -17.832,-4.242 -17.604,-4.47 -12.168,-4.47 -11.914,-4.216 -11.914,-2.184 -12.117,-1.981
BMB2 on Bottom "BMB2_L04_P107" (solid, pour order 107): 1.27,-3.912 -9.466,-3.912 -10.228,-3.15 -10.228,-0.229 -11.066,0.61 -12.59,0.61 -12.066,0.086 -12.066,-4.359 -10.228,-6.198 1.27,-6.198
BMA1 on Bottom "BMA1_L04_P106" (solid, pour order 106): 1.27,-13.868 -1.77,-13.868 -9.212,-21.311 -9.212,-24.351 -10.998,-26.137 -15.435,-26.137 -11.244,-21.946 -11.244,-20.168 -2.659,-11.582 1.27,-11.582
BMA2 on Bottom "BMA2_L04_P105" (solid, pour order 105): -11.025,-21.285 -11.025,-19.715 -2.727,-11.417 1.257,-11.417 1.27,-11.405 1.27,-8.992 -3.676,-8.992 -15.716,-21.031 -16.719,-21.031 -14.865,-22.885 -12.565,-22.885 -11.879,-22.2
BMB1 on Bottom "BMB1_L04_P103" (solid, pour order 103): -17.832,-4.24 -13.207,-8.865 1.27,-8.865 1.27,-6.325 1.232,-6.363 -10.228,-6.363 -11.914,-4.677 -11.914,-3.734
GND on Bottom "GND_L04_P039" (solid, pour order 108): -36.83,-25.67 -36.83,0.27 cw(c-35.83,0.27) -35.83,1.27 0.27,1.27 cw(c0.27,0.27) 1.27,0.27 1.27,-25.67 cw(c0.27,-25.67) 0.27,-26.67 -35.83,-26.67 cw(c-35.83,-25.67)
GND on GND "GND_L02_P037" (solid, pour order 98): -36.83,-25.67 -36.83,0.27 cw(c-35.83,0.27) -35.83,1.27 0.27,1.27 cw(c0.27,0.27) 1.27,0.27 1.27,-25.67 cw(c0.27,-25.67) 0.27,-26.67 -35.83,-26.67 cw(c-35.83,-25.67)
+VM on VM "+VM_L03_P050" (solid, pour order 99): -36.83,-25.67 -36.83,0.27 cw(c-35.83,0.27) -35.83,1.27 0.27,1.27 cw(c0.27,0.27) 1.27,0.27 1.27,-25.67 cw(c0.27,-25.67) 0.27,-26.67 -35.83,-26.67 cw(c-35.83,-25.67)

## Keep-outs
Keep-Out Layer:
  the board outline again, w0.102

## Silkscreen, mask and mechanical layers (free items; w line width, h text height)
Top Overlay:
  text "VCC_IO" at -33.634,-0.508 h1.02
  text "VS" at -1.651,-0.677 h0.81 r90
  text "GND" at -33.63,-3.048 h1.02
  text "GND" at -1.651,-3.623 h0.81 r90
  text "CSN" at -33.655,-5.588 h1.02
  text "B2" at -4.343,-5.588 h1.02
  text "SCK" at -33.655,-8.128 h1.02
  text "B1" at -4.005,-8.128 h1.02
  text "SDI" at -33.655,-10.668 h1.02
  text "A2" at -4.343,-10.668 h1.02
  text "SDO" at -33.655,-13.208 h0.89
  text "A1" at -4.005,-13.208 h1.02
  text "GND" at -5.359,-15.748 h1.02
  text "GND" at -33.415,-15.783 h0.89 r45
  text "CLK16" at -33.655,-17.399 h1.02
  text "DIAG0" at -6.196,-18.288 h1.02
  text "'.BoardName'_V'.BoardVersion'" at -13.455,-19.564 h0.89 r90
  text "DRV_ENN" at -33.706,-21.717 h0.84
  text "ENCA" at -5.35,-21.844 h1.02
  text "REFL" at -33.655,-23.368 h1.02
  text "ENCB" at -5.35,-23.876 h1.02
  text "REFR" at -33.655,-25.908 h1.02
  text "ENCN" at -5.35,-25.908 h1.02
Bottom Overlay:
  lines w0.203: -1.27,-13.97 -1.27,-3.81
  text "VCC_IO" at -28.043,-0.508 h1.02
  text "VS" at -1.864,-0.508 h1.02
  text "GND" at -30.947,-3.048 h1.02
  text "GND" at -1.864,-3.048 h1.02
  text "CSN" at -30.947,-5.588 h1.02
  text "B2" at -1.702,-5.588 h1.02
  text "SCK" at -30.947,-8.128 h1.02
  text "B1" at -1.753,-8.128 h1.02
  text "SDI" at -31.285,-10.668 h1.02
  text "A2" at -1.93,-10.668 h1.02
  text "SDO" at -30.947,-13.208 h1.02
  text "A1" at -1.93,-13.208 h1.02
  text "GND" at -30.947,-15.748 h1.02
  text "GND" at -1.93,-15.748 h1.02
  text "CLK16" at -29.084,-18.288 h1.02
  text "DIAG0" at -1.626,-18.288 h1.02
  text ".BoardVersion" at -24.452,-19.025 h1.27
  text ".BoardName" at -9.898,-19.025 h1.27
  text "Chip: TMC5160A" at -9.72,-20.803 h1.52
  text "DRV_ENN" at -26.884,-20.828 h1.02
  text "ENCA" at -1.626,-21.844 h1.02
  text "VSupply: 9…55V" at -9.72,-22.581 h1.52
  text "REFL" at -29.931,-23.368 h1.02
  text "ENCB" at -1.626,-23.876 h1.02
  text "Iphase, RMS: 2.8A" at -9.72,-24.359 h1.52
  text "REFR" at -29.931,-25.908 h1.02
  text "ENCN" at -1.626,-25.908 h1.02
TopAsm:
  text ".BoardName" at -33.711,-4.859 h1.02 r270
  text ".BoardVersion" at -33.88,-16.612 h1.02 r270

## Dimensions
0.27,-26.67 to 0.27,1.27 on Dimension
-36.83,0.27 to 1.27,0.27 on Dimension